# EAGLE board boilers (EAGLE 7.2.0)
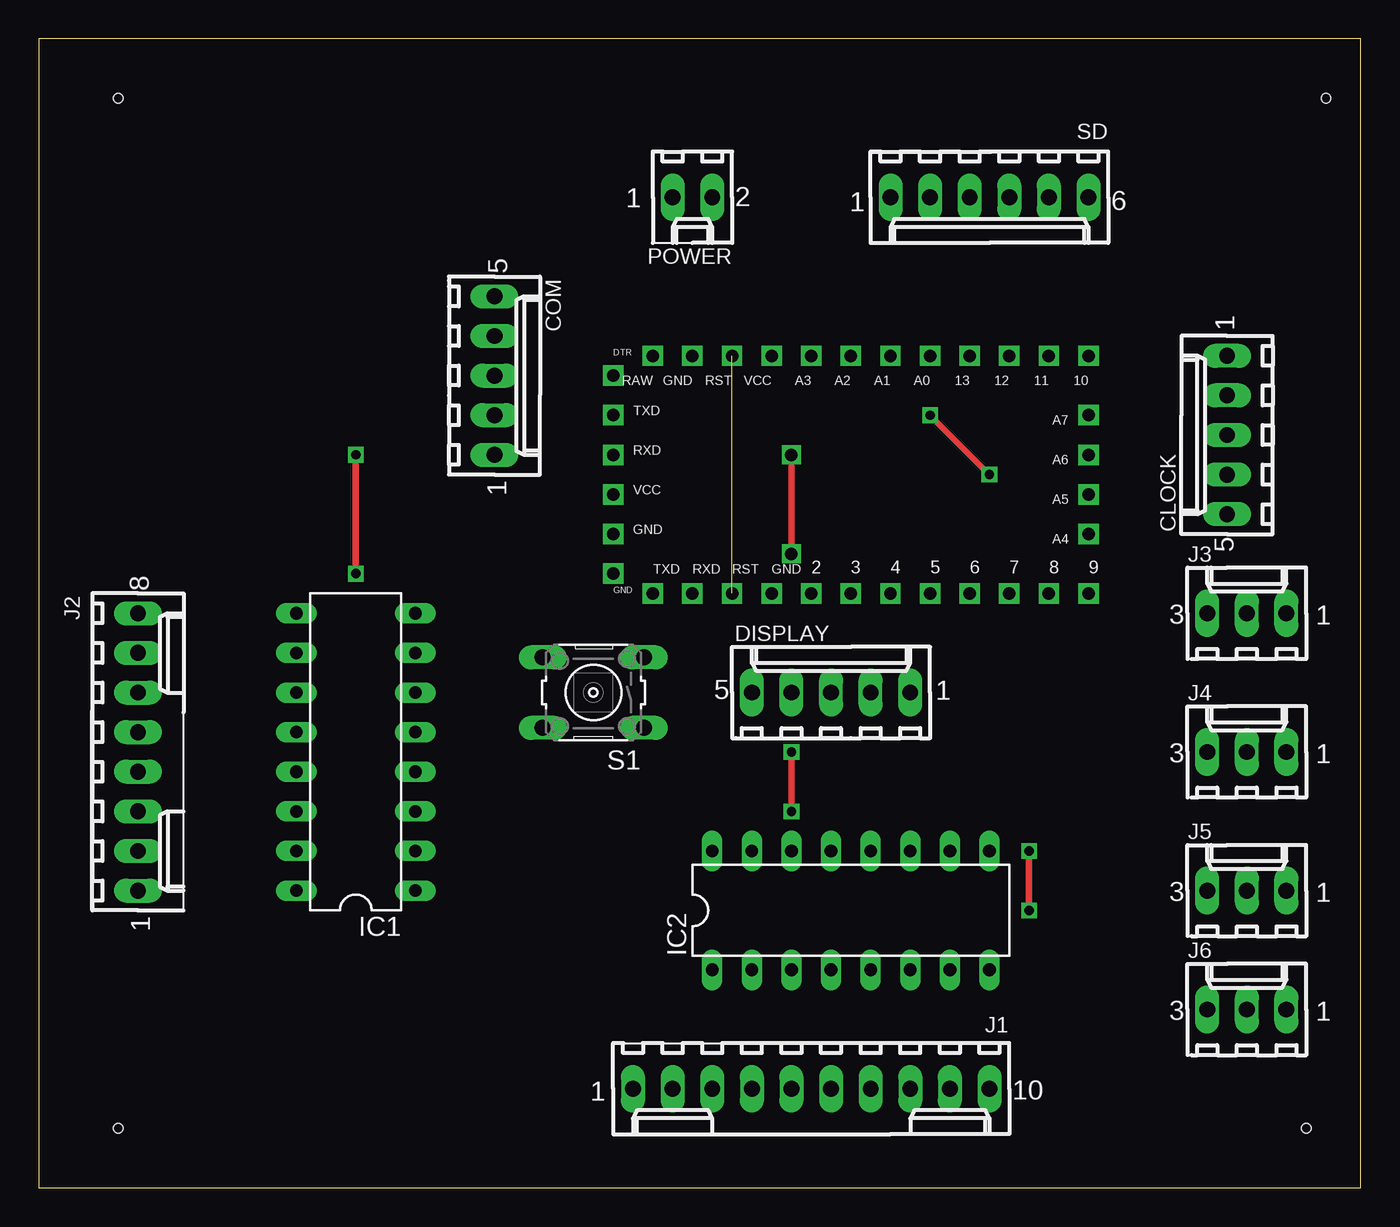
[diagram p0: board, top side]
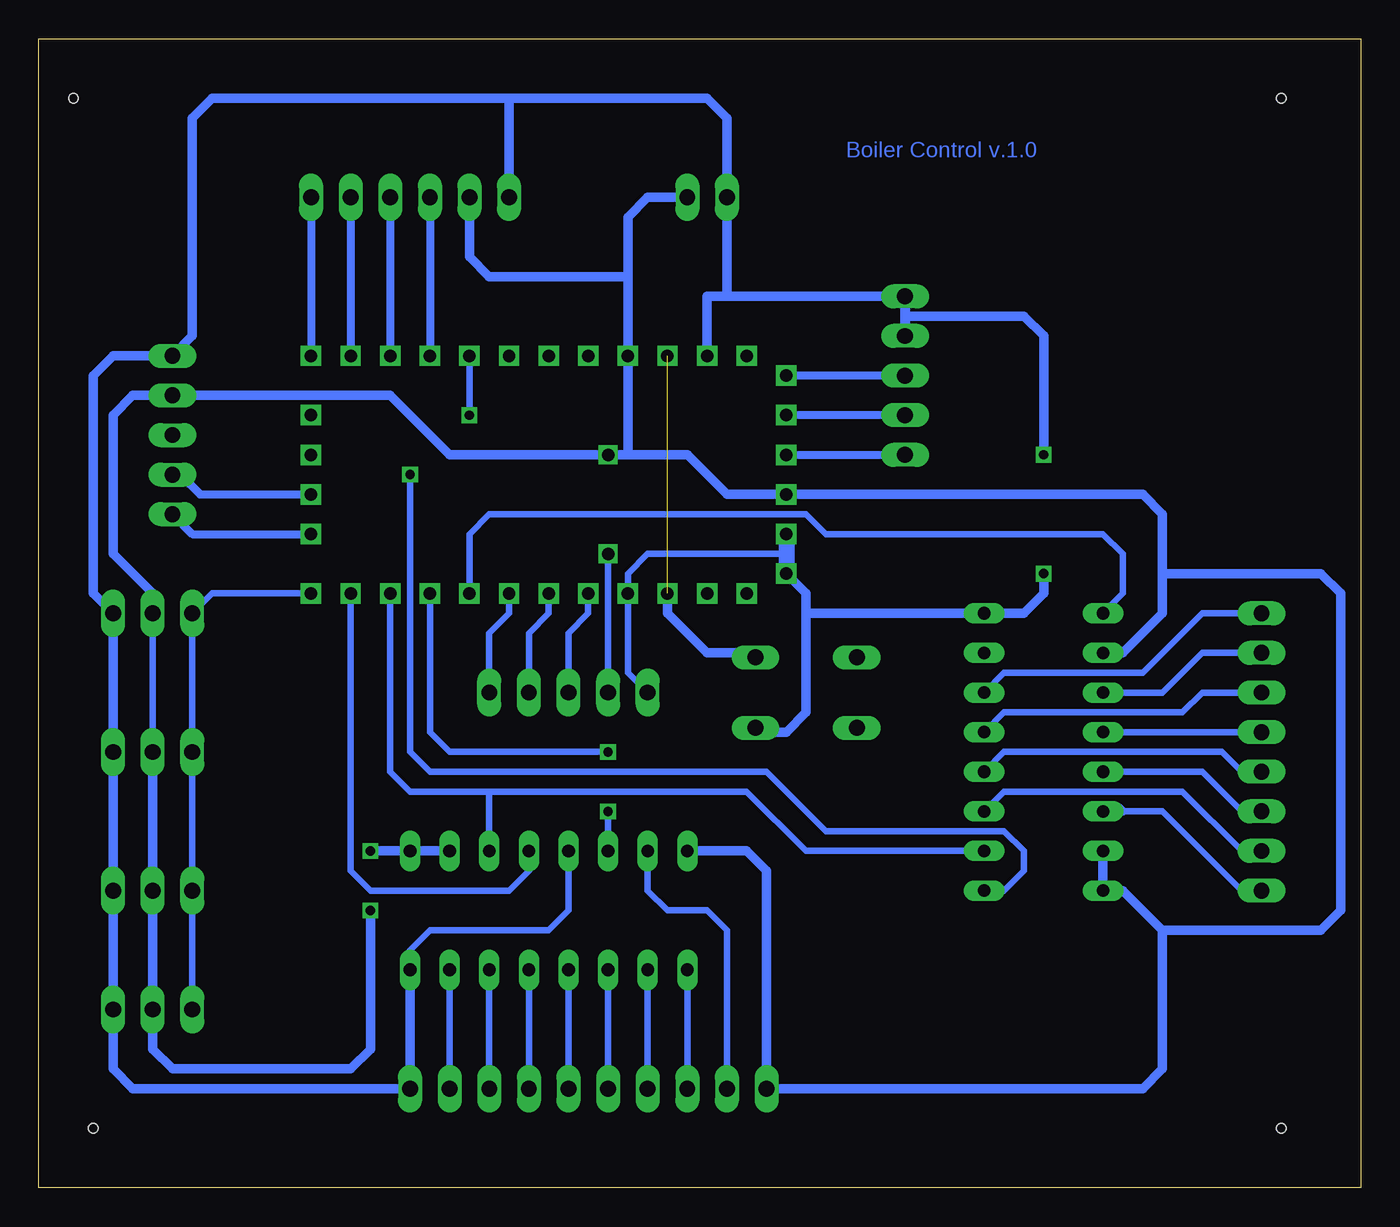
[diagram p1: board, bottom side, seen from below]

Size 84.76 x 73.65 mm. Coordinates in mm from the lower left corner, seen from the top.
Outline: 0,0 84.76,0 84.76,73.65 0,73.65 0,0
Copper layers (1*16): Top 0.035mm / dielectric 1.5mm / Bottom 0.035mm
Design rules "default": minimum track width 10mil, minimum drill 24mil, track to track 8mil, track to pad 8mil, pad to pad 8mil, via to via 8mil, smd to smd 8mil, copper to edge 40mil, drill to drill 8mil, minimum pad ring 10mil, minimum via ring 8mil, stop-mask expansion 4mil, vias tented up to drill 0mil, thermal gap 10mil
Net classes: 0 default: width 0.508 mm, clearance 0.508 mm; 1 power: width 0.635 mm, drill 0.381 mm, clearance 0.635 mm
Holes 0.6 mm at 5.08,69.85 82.55,69.85 5.08,3.81 81.28,3.81

## Footprints (pad centres in the part's own frame; a part is rotated, then mirrored left to right if it is on the bottom)
6410-05 = drill 1.016 long: 1 5.08,0; 2 2.54,0; 3 0,0; 4 -2.54,0; 5 -5.08,0
DIL16 = drill 0.813 long: 1 -8.89,-3.81; 2 -6.35,-3.81; 3 -3.81,-3.81; 4 -1.27,-3.81; 5 1.27,-3.81; 6 3.81,-3.81; 7 6.35,-3.81; 8 8.89,-3.81; 9 8.89,3.81; 10 6.35,3.81; 11 3.81,3.81; 12 1.27,3.81; 13 -1.27,3.81; 14 -3.81,3.81; 15 -6.35,3.81; 16 -8.89,3.81
6410-10 = drill 1.016 long: 1 11.43,0; 2 8.89,0; 3 6.35,0; 4 3.81,0; 5 1.27,0; 6 -1.27,0; 7 -3.81,0; 8 -6.35,0; 9 -8.89,0; 10 -11.43,0
6410-08 = drill 1.016 long: 1 8.89,0; 2 6.35,0; 3 3.81,0; 4 1.27,0; 5 -1.27,0; 6 -3.81,0; 7 -6.35,0; 8 -8.89,0
6410-03 = drill 1.016 long: 1 2.54,0; 2 0,0; 3 -2.54,0
6410-02 = drill 1.016 long: 1 1.27,0; 2 -1.27,0
B3F-10XX = drill 1.016 long: 1 -3.251,2.261; 2 3.251,2.261; 3 -3.251,-2.261; 4 3.251,-2.261
6410-06 = drill 1.016 long: 1 6.35,0; 2 3.81,0; 3 1.27,0; 4 -1.27,0; 5 -3.81,0; 6 -6.35,0
ARDUINOMINIPRO5V328 = drill 0.8 square: 2 -3.81,-3.81; 3 -1.27,-3.81; 4 1.27,-3.81; 5 3.81,-3.81; 6 6.35,-3.81; 7 8.89,-3.81; 8 11.43,-3.81; 9 13.97,-3.81; 10 13.97,11.43; 11 11.43,11.43; 12 8.89,11.43; 13 6.35,11.43; A0 3.81,11.43; A1 1.27,11.43; A2 -1.27,11.43; A3 -3.81,11.43; A4 13.97,0; A5 13.97,2.54; A6 13.97,5.08; A7 13.97,7.62; DTR -16.51,10.16; GND -6.35,-3.81; GND2 -11.43,11.43; GND3 -16.51,0; GND4 -16.51,-2.54; RAW -13.97,11.43; RST -8.89,-3.81; RST2 -8.89,11.43; RXD -11.43,-3.81; RXD2 -16.51,5.08; TXD -13.97,-3.81; TXD2 -16.51,7.62; VCC -6.35,11.43; VCC2 -16.51,2.54

## Placement (x,y rotation side)
CLOCK  22-27-2051-05  [6410-05]  76.2,48.26 90 top
COM  22-27-2051-05  [6410-05]  29.21,52.07 270 top
DISPLAY  22-27-2051-05  [6410-05]  50.8,31.75 0 top
IC1  74HC165N  [DIL16]  20.32,27.94 90 top
IC2  74HCT595N  [DIL16]  52.07,17.78 0 top
J1  22-27-2101-10  [6410-10]  49.53,6.35 180 top
J2  22-27-2081-08  [6410-08]  6.35,27.94 270 top
J3  22-27-2031-03  [6410-03]  77.47,36.83 0 top
J4  22-27-2031-03  [6410-03]  77.47,27.94 0 top
J5  22-27-2031-03  [6410-03]  77.47,19.05 0 top
J6  22-27-2031-03  [6410-03]  77.47,11.43 0 top
POWER  22-27-2021-02  [6410-02]  41.91,63.5 180 top
S1  [B3F-10XX]  35.56,31.75 180 top
SD  22-27-2061-06  [6410-06]  60.96,63.5 180 top
U$1  ARDUINOPROMINI5V328  [ARDUINOMINIPRO5V328]  53.34,41.91 0 top

## Library data of the parts
CLOCK COM DISPLAY J1-J6 POWER SD = con-molex; OC_FARNELL: unknown; OC_NEWARK: unknown
IC1 IC2 = 74xx-eu
S1 = switch-omron; MPN: B3F-1000; OC_FARNELL: 176432; OC_NEWARK: 36M3542
U$1 = arduino

## Nets
1HZ: CLOCK.3
+5V [power]: CLOCK.2 DISPLAY.4 IC1.10 IC1.15 IC1.16 IC2.10 IC2.16 J1.1 J3.2 J4.2 J5.2 J6.2 POWER.2 SD.2 U$1.VCC U$1.VCC2
A: IC1.11 J2.7
B: IC1.12 J2.5
C: IC1.13 J2.3
D: IC1.14 J2.1
E: IC1.3 J2.2
EXT_CLOCK: IC1.2 IC2.11 U$1.7
EXT_CS: IC2.12 U$1.8
EXT_CS_IN: IC1.1 U$1.A0
EXT_DATA_IN: IC1.9 U$1.5
EXT_DATA_OUT: IC2.14 U$1.6
F: IC1.4 J2.4
G: IC1.5 J2.6
GND [power]: CLOCK.1 COM.4 COM.5 DISPLAY.5 IC1.8 IC2.8 IC2.13 J1.10 J3.1 J4.1 J5.1 J6.1 POWER.1 S1.1 SD.1 U$1.GND U$1.GND2 U$1.GND3 U$1.GND4
H: IC1.6 J2.8
LED_CLOCK: DISPLAY.3 U$1.2
LED_CS: DISPLAY.2 U$1.3
LED_DATA: DISPLAY.1 U$1.4
MISO: SD.4 U$1.12
MOSI: SD.5 U$1.11
N$1: COM.1 U$1.RXD2
N$2: COM.3 U$1.DTR
QA: IC2.15 J1.2
QB: IC2.1 J1.3
QC: IC2.2 J1.4
QD: IC2.3 J1.5
QE: IC2.4 J1.6
QF: IC2.5 J1.7
QG: IC2.6 J1.8
QH: IC2.7 J1.9
RESET: S1.3 U$1.RST U$1.RST2
SCK: SD.3 U$1.13
SCL: CLOCK.4 U$1.A5
SDA: CLOCK.5 U$1.A4
SS: SD.6 U$1.10
TEMP_SENSOR: J3.3 J4.3 J5.3 J6.3 U$1.9
TXD: COM.2 U$1.TXD2

## Tracks (layer width: path | path; a pad name or v marks a point on that pad's centre or on a via)
+5V  (via drill 0.6, 0.8)
  Top 0.406: v48.26,46.99 v48.26,40.64 | v63.5,21.59 v63.5,17.78
  Bottom 0.406: v48.26,40.64 DISPLAY.4 | J3.2 J4.2 | IC1.10 15.24,34.29 | IC1.16 15.24,19.05
  Bottom 0.61: J4.2 J5.2 J6.2 77.47,8.89 76.2,7.62 64.77,7.62 63.5,8.89 v63.5,17.78 | 46.99,58.42 U$1.VCC 46.99,46.99 | POWER.2 45.72,63.5 46.99,62.23 46.99,58.42 | 46.99,58.42 55.88,58.42 57.15,59.69 SD.2 | J3.2 77.47,38.1 80.01,40.64 80.01,49.53 78.74,50.8 CLOCK.2 62.23,50.8 58.42,46.99 v48.26,46.99 46.99,46.99 | 46.99,46.99 43.18,46.99 40.64,44.45 U$1.VCC2 13.97,44.45 12.7,43.18 12.7,39.37 | IC2.10 v63.5,21.59 | IC1.16 IC1.15 | IC2.16 39.37,21.59 38.1,20.32 J1.1 13.97,6.35 12.7,7.62 12.7,16.51 | 15.24,34.29 12.7,36.83 12.7,39.37 | 15.24,19.05 12.7,16.51 | 12.7,16.51 2.54,16.51 1.27,17.78 1.27,38.1 2.54,39.37 12.7,39.37
A
  Bottom 0.406: J2.7 10.16,34.29 12.7,31.75 IC1.11
B
  Bottom 0.406: IC1.12 J2.5
C
  Bottom 0.406: IC1.13 10.16,26.67 7.62,24.13 J2.3
D
  Bottom 0.406: 15.24,24.13 12.7,24.13 7.62,19.05 J2.1
  Bottom 0.508: IC1.14 16.26,24.38 15.49,24.38 15.24,24.13
E
  Bottom 0.406: IC1.3 22.86,25.4 11.43,25.4 7.62,21.59 J2.2
EXT_CLOCK
  Bottom 0.406: IC1.2 35.56,21.59 39.37,25.4 55.88,25.4 | IC2.11 55.88,25.4 | 55.88,25.4 60.96,25.4 62.23,26.67 U$1.7
EXT_CS
  Bottom 0.406: U$1.8 64.77,20.32 63.5,19.05 54.61,19.05 53.34,20.32 IC2.12
EXT_CS_IN  (via drill 0.6)
  Top 0.406: v60.96,45.72 v57.15,49.53
  Bottom 0.406: IC1.1 22.86,19.05 21.59,20.32 21.59,21.59 22.86,22.86 34.29,22.86 38.1,26.67 59.69,26.67 60.96,27.94 v60.96,45.72 | v57.15,49.53 U$1.A0
EXT_DATA_IN
  Bottom 0.406: U$1.5 57.15,41.91 55.88,43.18 35.56,43.18 34.29,41.91 16.51,41.91 15.24,40.64 15.24,38.1 IC1.9
EXT_DATA_OUT  (via drill 0.6)
  Top 0.406: v48.26,27.94 v48.26,24.13
  Bottom 0.406: U$1.6 59.69,29.21 58.42,27.94 v48.26,27.94 | v48.26,24.13 IC2.14
F
  Bottom 0.406: IC1.4 22.86,27.94 8.89,27.94 7.62,26.67 J2.4
G
  Bottom 0.406: IC1.5 22.86,30.48 11.43,30.48 10.16,31.75 J2.6
GND  (via drill 0.6)
  Top 0.406: v20.32,39.37 v20.32,46.99
  Bottom 0.406: DISPLAY.5 46.99,33.02 U$1.GND 46.99,39.37 45.72,40.64 36.83,40.64 | IC2.8 60.96,15.24 59.69,16.51 52.07,16.51 50.8,17.78 IC2.13
  Bottom 0.61: 40.64,57.15 41.91,57.15 U$1.GND2 | 40.64,57.15 COM.5 | 40.64,57.15 POWER.1 40.64,68.58 41.91,69.85 54.61,69.85 | 54.61,69.85 SD.1 | 54.61,69.85 73.66,69.85 74.93,68.58 74.93,54.61 CLOCK.1 80.01,53.34 81.28,52.07 81.28,38.1 J3.1 J4.1 J5.1 J6.1 80.01,7.62 78.74,6.35 J1.10 IC2.8 | v20.32,46.99 20.32,54.61 21.59,55.88 29.21,55.88 | 35.56,36.83 IC1.8 21.59,36.83 20.32,38.1 v20.32,39.37 | 35.56,36.83 35.56,30.48 36.83,29.21 38.53,29.21 S1.1 | 35.56,36.83 35.56,38.1 U$1.GND4
  Bottom 0.635: COM.5 29.21,55.88 COM.4
  Bottom 1.016: U$1.GND3 36.83,40.64 U$1.GND4
H
  Bottom 0.406: IC1.6 22.86,33.02 13.97,33.02 10.16,36.83 J2.8
LED_CLOCK
  Bottom 0.406: DISPLAY.3 50.8,35.56 49.53,36.83 U$1.2
LED_CS
  Bottom 0.406: DISPLAY.2 53.34,35.56 52.07,36.83 U$1.3
LED_DATA
  Bottom 0.406: DISPLAY.1 55.88,35.56 54.61,36.83 U$1.4
MISO
  Bottom 0.508: SD.4 U$1.12
MOSI
  Bottom 0.508: SD.5 U$1.11
N$1
  Bottom 0.508: U$1.RXD2 COM.1
N$2
  Bottom 0.508: COM.3 U$1.DTR
QA
  Bottom 0.406: IC2.15 45.72,19.05 44.45,17.78 41.91,17.78 40.64,16.51 J1.2
QB
  Bottom 0.406: J1.3 IC2.1
QC
  Bottom 0.406: IC2.2 J1.4
QD
  Bottom 0.406: J1.5 IC2.3
QE
  Bottom 0.406: IC2.4 J1.6 50.8,5.08
QF
  Bottom 0.406: J1.7 IC2.5
QG
  Bottom 0.406: IC2.6 J1.8
QH
  Bottom 0.406: J1.9 IC2.7
RESET  (1 unrouted)
  Bottom 0.61: U$1.RST 44.45,36.83 41.91,34.29 39.09,34.29 S1.3
SCK
  Bottom 0.508: SD.3 U$1.13
SCL
  Bottom 0.508: U$1.A5 74.42,44.45 75.69,45.72 CLOCK.4
SDA
  Bottom 0.508: U$1.A4 74.93,41.91 CLOCK.5
SS
  Bottom 0.508: SD.6 U$1.10
TEMP_SENSOR
  Bottom 0.406: J6.3 J5.3 J4.3 J3.3 73.66,38.1 U$1.9
TXD
  Bottom 0.508: COM.2 U$1.TXD2

## Text on the board
Bottom: Boiler Control v.1.0